# EAGLE board obc (EAGLE 9.5.0), part 1 of 2
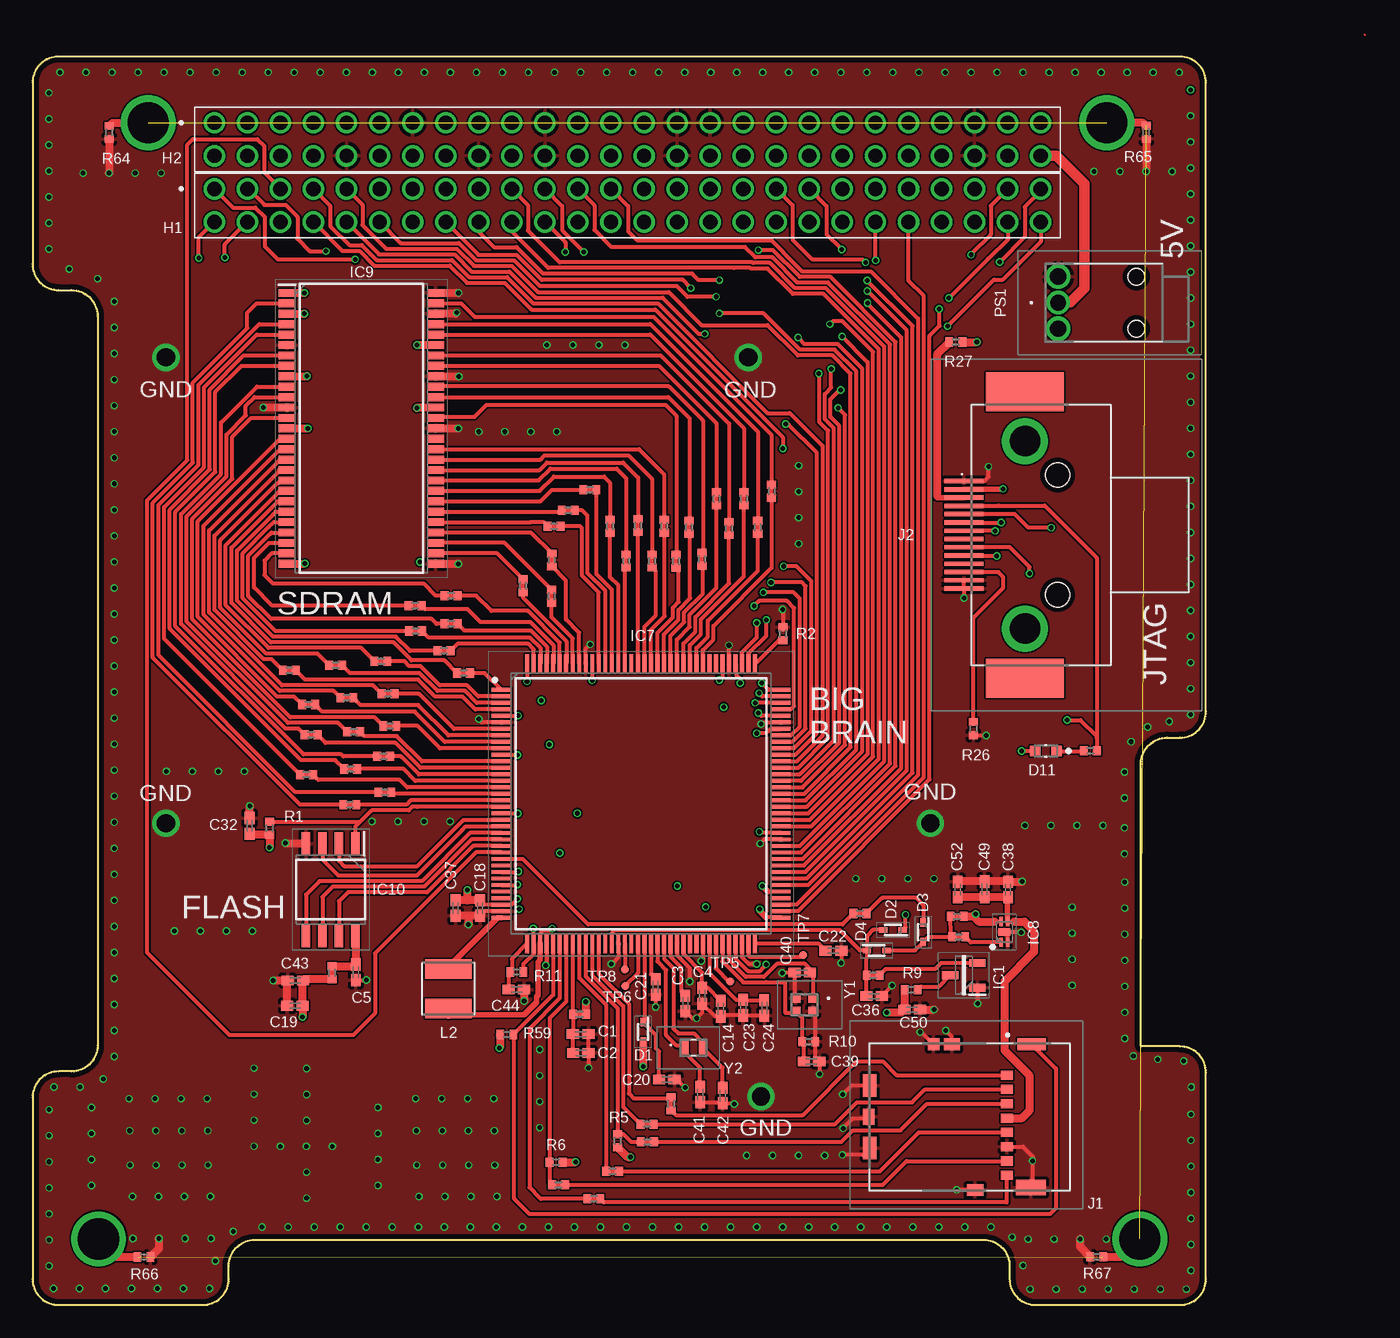
[diagram p0: board, top side]
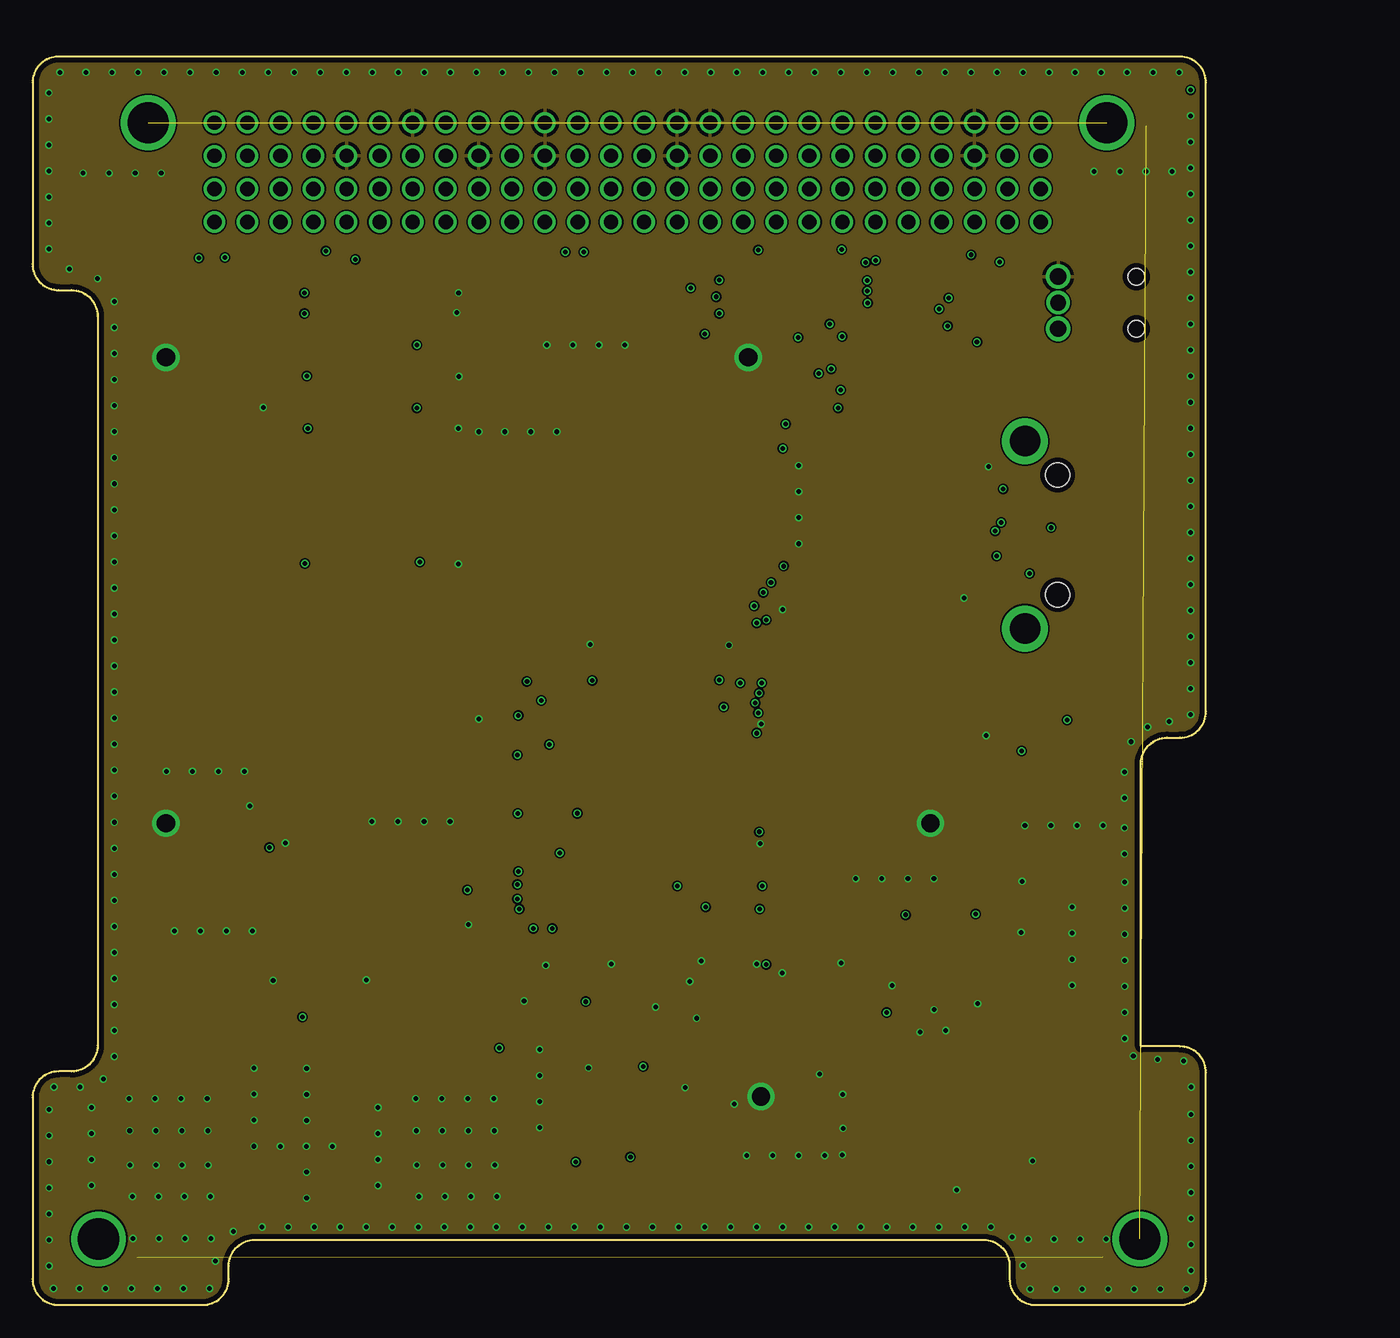
[diagram p1: board, inner layer Route2]
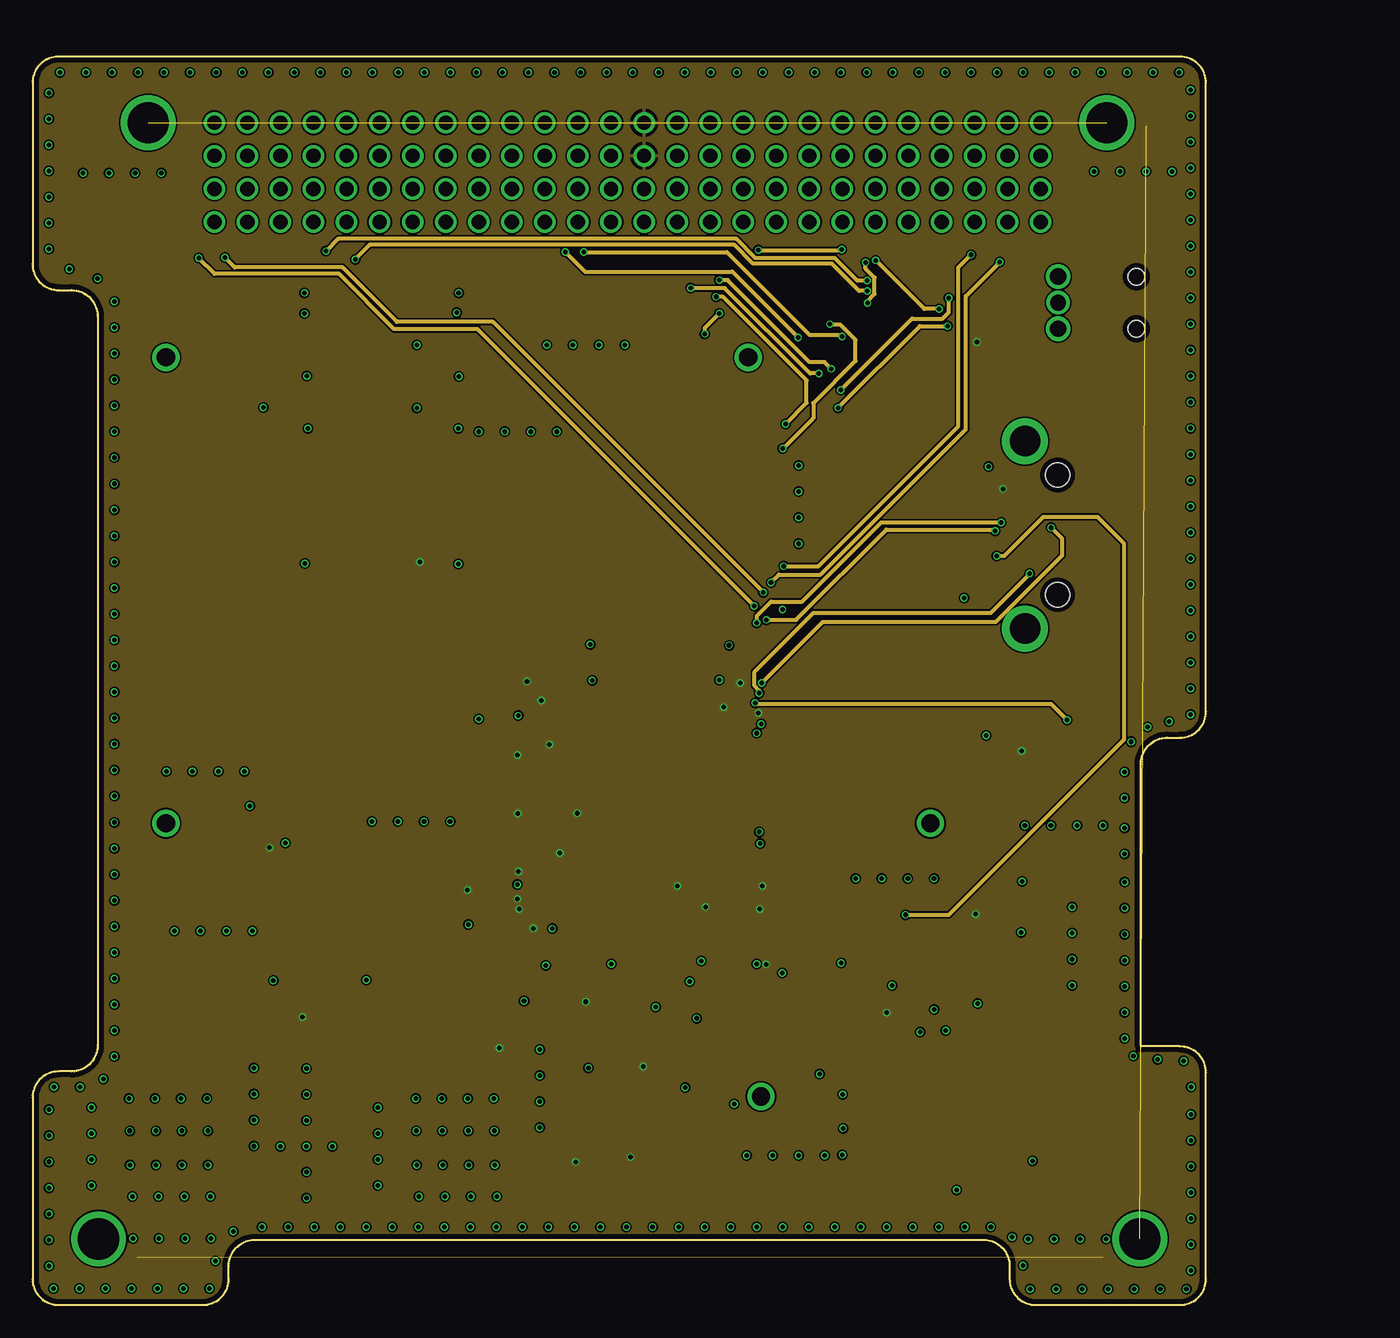
[diagram p2: board, inner layer Route15]
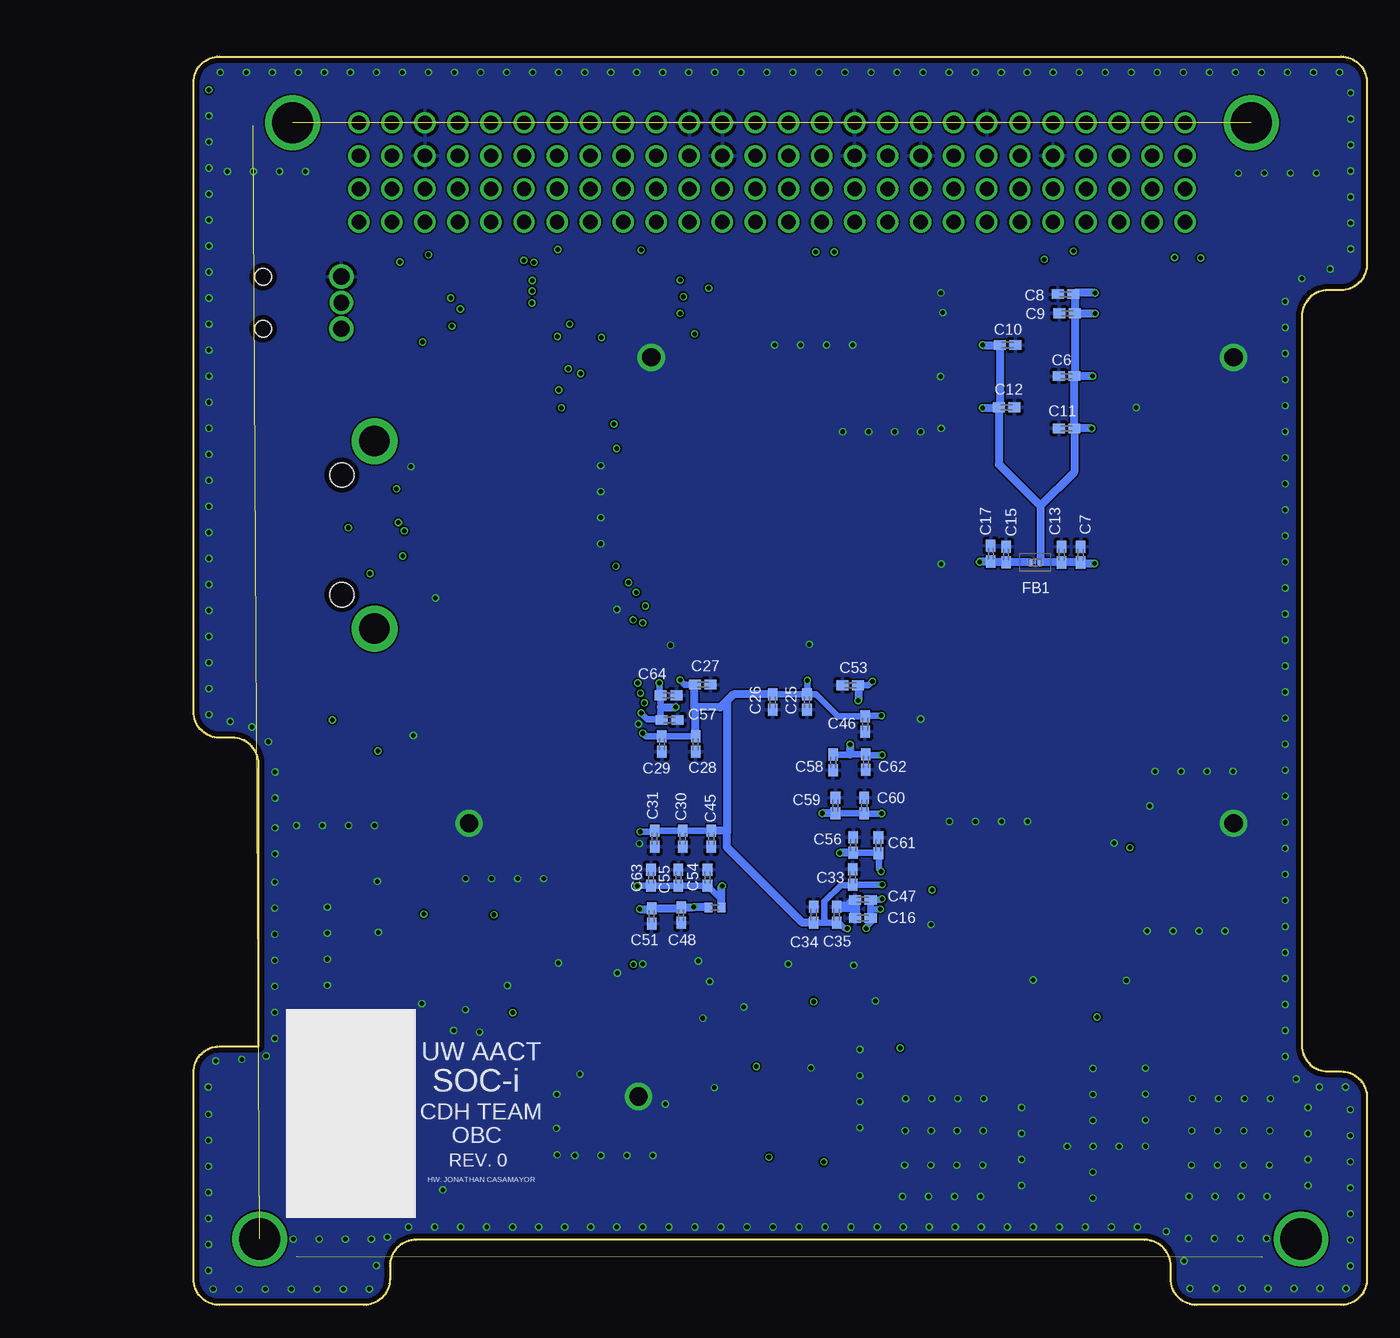
[diagram p3: board, bottom side, seen from below]

Size 90.17 x 95.89 mm. Coordinates in mm from the lower left corner, seen from the top.
Outline: 85.17,19.86 85.17,41.57 arc-90 87.17,43.57 88.17,43.57 arc90 90.17,45.57 90.17,93.89 arc90 88.17,95.89 2,95.89 arc90 0,93.89 0,79.95 arc90 2,77.95 3,77.95 arc-90 5,75.95 5,19.94 arc-90 3,17.94 2,17.94 arc90 0,15.94 0,2 arc90 2,0 13.08,0 arc90 15.08,2 15.08,3 arc-90 17.08,5 73.08,5 arc-90 75.08,3 75.08,2 arc90 77.08,0 88.17,0 arc90 90.17,2 90.17,17.86 arc90 88.17,19.86 85.17,19.86
Copper layers (1*2*15*16): Top 0.035559375mm / dielectric 0.17018125mm / Route2 0.01778125mm / dielectric 47mil / Route15 0.01778125mm / dielectric 0.17018125mm / Bottom 0.035559375mm
Design rules "oshpark-4layer *": minimum track width 5mil, minimum drill 10mil, track to track 5mil, track to pad 5mil, pad to pad 5mil, via to via 5mil, smd to smd 5mil, copper to edge 15mil, drill to drill 6mil, minimum pad ring 4mil, minimum via ring 4mil, stop-mask expansion 2.5mil, vias tented up to drill 0.36mm, thermal gap 10mil

## Footprints (pad centres in the part's own frame; a part is rotated, then mirrored left to right if it is on the bottom)
C0402K = smd 0.925 x 0.74: 1 -0.6,0; 2 0.6,0
SODFL1608X70N = smd 0.64 x 0.42: 1 -0.75,0; 2 0.75,0
KINGBRIGHT_KPT-1608SGC_0 = smd 0.8 x 0.8: 1 -0.825,0; 2 0.825,0
NFZ15SG152SN10B = smd 0.4 x 0.5: 1 -0.4,0; 2 0.4,0
SAMTEC_ESQ-126-39-G-D = drill 1.1: 1 0,0; 2 0,-2.54; 3 2.54,0; 4 2.54,-2.54; 5 5.08,0; 6 5.08,-2.54; 7 7.62,0; 8 7.62,-2.54; 9 10.16,0; 10 10.16,-2.54; 11 12.7,0; 12 12.7,-2.54; 13 15.24,0; 14 15.24,-2.54; 15 17.78,0; 16 17.78,-2.54; 17 20.32,0; 18 20.32,-2.54; 19 22.86,0; 20 22.86,-2.54; 21 25.4,0; 22 25.4,-2.54; 23 27.94,0; 24 27.94,-2.54; 25 30.48,0; 26 30.48,-2.54; 27 33.02,0; 28 33.02,-2.54; 29 35.56,0; 30 35.56,-2.54; 31 38.1,0; 32 38.1,-2.54; 33 40.64,0; 34 40.64,-2.54; 35 43.18,0; 36 43.18,-2.54; 37 45.72,0; 38 45.72,-2.54; 39 48.26,0; 40 48.26,-2.54; 41 50.8,0; 42 50.8,-2.54; 43 53.34,0; 44 53.34,-2.54; 45 55.88,0; 46 55.88,-2.54; 47 58.42,0; 48 58.42,-2.54; 49 60.96,0; 50 60.96,-2.54; 51 63.5,0; 52 63.5,-2.54
SOT95P237X112-3N = smd 1.25 x 0.6: 1 -1.05,0.95; 2 -1.05,-0.95; 3 1.05,0
QFP50P2200X2200X160-144N = smd 1.475 x 0.3: 1 -10.738,8.75; 2 -10.738,8.25; 3 -10.738,7.75; 4 -10.738,7.25; 5 -10.738,6.75; 6 -10.738,6.25; 7 -10.738,5.75; 8 -10.738,5.25; 9 -10.738,4.75; 10 -10.738,4.25; 11 -10.738,3.75; 12 -10.738,3.25; 13 -10.738,2.75; 14 -10.738,2.25; 15 -10.738,1.75; 16 -10.738,1.25; 17 -10.738,0.75; 18 -10.738,0.25; 19 -10.738,-0.25; 20 -10.738,-0.75; 21 -10.738,-1.25; 22 -10.738,-1.75; 23 -10.738,-2.25; 24 -10.738,-2.75; 25 -10.738,-3.25; 26 -10.738,-3.75; 27 -10.738,-4.25; 28 -10.738,-4.75; 29 -10.738,-5.25; 30 -10.738,-5.75; 31 -10.738,-6.25; 32 -10.738,-6.75; 33 -10.738,-7.25; 34 -10.738,-7.75; 35 -10.738,-8.25; 36 -10.738,-8.75; 73 10.738,-8.75; 74 10.738,-8.25; 75 10.738,-7.75; 76 10.738,-7.25; 77 10.738,-6.75; 78 10.738,-6.25; 79 10.738,-5.75; 80 10.738,-5.25; 81 10.738,-4.75; 82 10.738,-4.25; 83 10.738,-3.75; 84 10.738,-3.25; 85 10.738,-2.75; 86 10.738,-2.25; 87 10.738,-1.75; 88 10.738,-1.25; 89 10.738,-0.75; 90 10.738,-0.25; 91 10.738,0.25; 92 10.738,0.75; 93 10.738,1.25; 94 10.738,1.75; 95 10.738,2.25; 96 10.738,2.75; 97 10.738,3.25; 98 10.738,3.75; 99 10.738,4.25; 100 10.738,4.75; 101 10.738,5.25; 102 10.738,5.75; 103 10.738,6.25; 104 10.738,6.75; 105 10.738,7.25; 106 10.738,7.75; 107 10.738,8.25; 108 10.738,8.75 | smd 0.3 x 1.475: 37 -8.75,-10.738; 38 -8.25,-10.738; 39 -7.75,-10.738; 40 -7.25,-10.738; 41 -6.75,-10.738; 42 -6.25,-10.738; 43 -5.75,-10.738; 44 -5.25,-10.738; 45 -4.75,-10.738; 46 -4.25,-10.738; 47 -3.75,-10.738; 48 -3.25,-10.738; 49 -2.75,-10.738; 50 -2.25,-10.738; 51 -1.75,-10.738; 52 -1.25,-10.738; 53 -0.75,-10.738; 54 -0.25,-10.738; 55 0.25,-10.738; 56 0.75,-10.738; 57 1.25,-10.738; 58 1.75,-10.738; 59 2.25,-10.738; 60 2.75,-10.738; 61 3.25,-10.738; 62 3.75,-10.738; 63 4.25,-10.738; 64 4.75,-10.738; 65 5.25,-10.738; 66 5.75,-10.738; 67 6.25,-10.738; 68 6.75,-10.738; 69 7.25,-10.738; 70 7.75,-10.738; 71 8.25,-10.738; 72 8.75,-10.738; 109 8.75,10.738; 110 8.25,10.738; 111 7.75,10.738; 112 7.25,10.738; 113 6.75,10.738; 114 6.25,10.738; 115 5.75,10.738; 116 5.25,10.738; 117 4.75,10.738; 118 4.25,10.738; 119 3.75,10.738; 120 3.25,10.738; 121 2.75,10.738; 122 2.25,10.738; 123 1.75,10.738; 124 1.25,10.738; 125 0.75,10.738; 126 0.25,10.738; 127 -0.25,10.738; 128 -0.75,10.738; 129 -1.25,10.738; 130 -1.75,10.738; 131 -2.25,10.738; 132 -2.75,10.738; 133 -3.25,10.738; 134 -3.75,10.738; 135 -4.25,10.738; 136 -4.75,10.738; 137 -5.25,10.738; 138 -5.75,10.738; 139 -6.25,10.738; 140 -6.75,10.738; 141 -7.25,10.738; 142 -7.75,10.738; 143 -8.25,10.738; 144 -8.75,10.738
SON50P160X120X60-5N = smd 0.7 x 0.3: 1 -0.8,0.25; 2 -0.8,-0.25; 3 0.8,-0.25; 4 0.8,0.25 | smd 0.55 x 0.91: 5 0,0
SOP80P1176X120-54N = smd 1.27 x 0.6: 1 -5.715,10.4; 2 -5.715,9.6; 3 -5.715,8.8; 4 -5.715,8; 5 -5.715,7.2; 6 -5.715,6.4; 7 -5.715,5.6; 8 -5.715,4.8; 9 -5.715,4; 10 -5.715,3.2; 11 -5.715,2.4; 12 -5.715,1.6; 13 -5.715,0.8; 14 -5.715,0; 15 -5.715,-0.8; 16 -5.715,-1.6; 17 -5.715,-2.4; 18 -5.715,-3.2; 19 -5.715,-4; 20 -5.715,-4.8; 21 -5.715,-5.6; 22 -5.715,-6.4; 23 -5.715,-7.2; 24 -5.715,-8; 25 -5.715,-8.8; 26 -5.715,-9.6; 27 -5.715,-10.4; 28 5.715,-10.4; 29 5.715,-9.6; 30 5.715,-8.8; 31 5.715,-8; 32 5.715,-7.2; 33 5.715,-6.4; 34 5.715,-5.6; 35 5.715,-4.8; 36 5.715,-4; 37 5.715,-3.2; 38 5.715,-2.4; 39 5.715,-1.6; 40 5.715,-0.8; 41 5.715,0; 42 5.715,0.8; 43 5.715,1.6; 44 5.715,2.4; 45 5.715,3.2; 46 5.715,4; 47 5.715,4.8; 48 5.715,5.6; 49 5.715,6.4; 50 5.715,7.2; 51 5.715,8; 52 5.715,8.8; 53 5.715,9.6; 54 5.715,10.4
SOIC127P790X216-8N = smd 1.785 x 0.65: 1 -3.532,1.905; 2 -3.532,0.635; 3 -3.532,-0.635; 4 -3.532,-1.905; 5 3.532,-1.905; 6 3.532,-0.635; 7 3.532,0.635; 8 3.532,1.905
5040771891 = smd 0.7 x 0.95: 1 -2.847,2.887; 2 -1.747,2.887; 3 -0.647,2.887; 4 0.453,2.887; 5 1.553,2.887; 6 2.653,2.887; 7 3.753,2.887; 8 4.853,2.887 | smd 0.95 x 2.17: 9 -5.222,4.787 | smd 1.19 x 2.3: 10 5.798,4.722 | smd 0.88 x 1.25: 11 5.963,0.447 | smd 1.7 x 1.03: 12 2.753,-7.663; 13 -2.047,-7.663 | smd 1.2 x 0.88: 14 0.353,-7.738 | smd 0.95 x 1.2: 15 -5.222,-1.338 | smd 0.9 x 0.9: 16 -5.222,-2.748
12214825000FR = smd 0.335 x 3: 1 4.127,8.65; 2 2.857,8.65; 3 1.587,8.65; 4 0.317,8.65; 5 -0.953,8.65; 6 -2.223,8.65; 7 -3.493,8.65; 8 3.492,8.65; 9 2.223,8.65; 10 0.953,8.65; 11 -0.318,8.65; 12 -1.588,8.65; 13 -2.858,8.65; 14 -4.128,8.65 | drill 2.35 pad 3.525: MH1 -7.2,3.95; MH2 7.2,3.95 | smd 3 x 6: MP1 -11,3.95; MP2 11,3.95 | hole 1.88: -4.6,1.45; 4.6,1.45
SRN4026 = smd 1.5 x 3.6: 1 -1.525,0; 2 1.525,0
PJ040D = drill 1.209 pad 1.768: 1 6,-3 | drill 1.26 pad 1.768: 2 6,-5; 3 6,-1 | hole 1.3: 0,-5; 0,-1
R0402 = smd 0.6 x 0.7: 1 -0.5,0; 2 0.5,0
TP06R = smd 0.6 x 0.6: TP 0,0
XRCGB24M000F2P01R0 = smd 0.75 x 0.7: 1 -0.675,-0.5; 2 0.675,-0.5; 3 0.675,0.5; 4 -0.675,0.5
ECS327712TR = smd 0.6 x 1.1: 1 -0.7,0; 2 0.7,0

## Placement (x,y rotation side)
C1  0.1uF  [C0402K]  42.11,20.8 180 top
C2  4.7uF  [C0402K]  42.14,19.35 180 top
C3  1.0 uF  [C0402K]  50.16,23.16 90 top
C4  0.1uF  [C0402K]  51.46,23.75 90 top
C5  1.0uF  [C0402K]  24.84,25.55 90 top
C6  4.7uF  [C0402K]  23.09,71.35 180 bottom
C7  0.1uF  [C0402K]  22,57.63 90 bottom
C8  0.1uF  [C0402K]  23.16,77.65 180 bottom
C9  0.1uF  [C0402K]  23.04,76.17 180 bottom
C10  0.1uF  [C0402K]  27.61,73.74 0 bottom
C11  0.1uF  [C0402K]  23.09,67.34 180 bottom
C12  0.1uF  [C0402K]  27.69,68.96 0 bottom
C13  0.1uF  [C0402K]  23.47,57.63 90 bottom
C14  10 uF  [C0402K]  52.88,22.76 90 top
C15  1.0uF  [C0402K]  27.74,57.66 270 bottom
C16  0.22uF  [C0402K]  38.73,29.72 0 bottom
C17  0.1uF  [C0402K]  28.91,57.71 270 bottom
C18  4.7uF  [C0402K]  34.39,30.48 90 top
C19  0.22uF  [C0402K]  20.17,22.99 0 top
C20  0.22uF  [C0402K]  48.74,17.32 180 top
C21  0.22uF  [C0402K]  47.88,24.43 90 top
C22  0.22uF  [C0402K]  61.54,27.2 180 top
C23  0.1uF  [C0402K]  54.61,22.83 90 top
C24  4.7uF  [C0402K]  56.24,22.81 90 top
C25  0.22uF  [C0402K]  43.03,46.3 90 bottom
C26  0.22uF  [C0402K]  45.67,46.3 90 bottom
C27  0.22uF  [C0402K]  51.03,47.65 180 bottom
C28  0.22uF  [C0402K]  51.59,43.08 90 bottom
C29  0.22uF  [C0402K]  54.18,43.08 90 bottom
C30  0.22uF  [C0402K]  52.58,35.81 90 bottom
C31  0.22uF  [C0402K]  54.74,35.81 90 bottom
C32  0.1uF  [C0402K]  16.69,36.8 270 top
C33  0.22uF  [C0402K]  39.52,32.87 270 bottom
C34  0.22uF  [C0402K]  42.52,29.97 270 bottom
C35  4.7uF  [C0402K]  40.74,29.97 270 bottom
C36  0.1uF  [C0402K]  64.67,23.72 180 top
C37  0.1uF  [C0402K]  32.51,30.48 90 top
C38  0.1uF  [C0402K]  74.96,31.9 270 top
C39  4.7pF  [C0402K]  59.87,18.69 180 top
C40  4.7pF  [C0402K]  59.13,25.53 0 top
C41  10pF  [C0402K]  51.31,16.15 90 top
C42  10pF  [C0402K]  53.04,16.08 90 top
C43  0.1uF  [C0402K]  20.19,24.92 0 top
C44  0.22uF  [C0402K]  37.19,24.23 180 top
C45  0.22uF  [C0402K]  50.39,35.81 90 bottom
C46  0.22uF  [C0402K]  38.56,44.63 90 bottom
C47  0.22uF  [C0402K]  38.73,31.11 0 bottom
C48  0.22uF  [C0402K]  52.7,29.95 90 bottom
C49  4.7uF  [C0402K]  73.15,31.93 270 top
C50  1.0uF  [C0402K]  67.59,22.68 180 top
C51  4.7uF  [C0402K]  54.97,29.87 90 bottom
C52  4.7uF  [C0402K]  71.09,31.9 270 top
C53  0.1uF  [C0402K]  39.7,47.6 0 bottom
C54  0.1uF  [C0402K]  50.67,32.82 270 bottom
C55  0.1uF  [C0402K]  52.91,32.82 270 bottom
C56  0.1uF  [C0402K]  39.47,35.33 270 bottom
C57  0.1uF  [C0402K]  53.59,44.93 180 bottom
C58  0.1uF  [C0402K]  41.02,41.68 90 bottom
C59  0.1uF  [C0402K]  40.84,38.35 270 bottom
C60  4.7uF  [C0402K]  38.63,38.35 270 bottom
C61  4.7uF  [C0402K]  37.54,35.31 270 bottom
C62  4.7uF  [C0402K]  38.51,41.71 90 bottom
C63  4.7uF  [C0402K]  55.02,32.82 270 bottom
C64  4.7uF  [C0402K]  53.67,46.84 180 bottom
D1  BAT54XV2T1G  [SODFL1608X70N]  46.91,20.98 270 top
D2  BAT54XV2T1G  [SODFL1608X70N]  66.12,28.8 180 top
D3  BAT54XV2T1G  [SODFL1608X70N]  68.45,28.63 270 top
D4  BAT54XV2T1G  [SODFL1608X70N]  64.87,27.23 0 top
D11  KINGBRIGHT_KPT-1608SGCKINGBRIGHT_KPT-1608SGC_0_0  [KINGBRIGHT_KPT-1608SGC_0]  77.88,42.55 180 top
FB1  BLM15AG121SN1D  [NFZ15SG152SN10B]  25.5,57.05 0 bottom
H1  ESQ-126-39-G-D  [SAMTEC_ESQ-126-39-G-D]  13.97,85.73 0 top
H2  ESQ-126-39-G-D  [SAMTEC_ESQ-126-39-G-D]  13.97,90.81 0 top
IC1  TPS3839L30DBZR  [SOT95P237X112-3N]  71.55,25.32 180 top
IC7  MIMXRT1021DAG5A  [QFP50P2200X2200X160-144N]  46.76,38.51 0 top
IC8  MIC94305YMT-TR  [SON50P160X120X60-5N]  74.68,28.65 90 top
IC9  IS42S16160J-6TL  [SOP80P1176X120-54N]  25.27,67.34 0 top
IC10  IS25LP064A-JBLE  [SOIC127P790X216-8N]  22.91,31.9 270 top
J1  504077-1891  [5040771891]  71.98,14.81 270 top
J2  12214-8250-00FR  [12214825000FR]  80.21,59.16 90 top
L2  SRN4026-4R7M  [SRN4026]  31.95,24.28 90 top
PS1  PJ-040D  [PJ040D]  84.81,73.99 180 top
R1  10k Ohm  [R0402]  18.21,36.63 90 top
R2  10k Ohm  [R0402]  57.66,51.56 270 top
R3  0 Ohm  [R0402]  42.04,22.33 180 top
R4  0 Ohm  [R0402]  23.01,25.53 90 top
R5  10k Ohm  [R0402]  44.96,12.62 90 top
R6  10k Ohm  [R0402]  40.23,10.97 180 top
R7  0 Ohm  [R0402]  63.58,30.07 0 top
R8  0 Ohm  [R0402]  64.59,25.32 180 top
R9  1k Ohm  [R0402]  67.51,24.21 0 top
R10  2.2M Ohm  [R0402]  59.64,20.22 0 top
R11  30k Ohm  [R0402]  37.21,25.58 0 top
R12  0 Ohm  [R0402]  56.79,62.51 90 top
R13  0 Ohm  [R0402]  55.73,59.74 90 top
R14  0 Ohm  [R0402]  54.66,61.93 90 top
R15  0 Ohm  [R0402]  53.52,59.64 90 top
R16  0 Ohm  [R0402]  52.55,61.93 90 top
R17  0 Ohm  [R0402]  51.44,57.28 90 top
R18  0 Ohm  [R0402]  50.44,59.74 90 top
R19  0 Ohm  [R0402]  49.45,57.12 90 top
R20  0 Ohm  [R0402]  48.54,59.82 90 top
R21  0 Ohm  [R0402]  47.6,57.15 90 top
R22  0 Ohm  [R0402]  46.53,59.87 90 top
R23  0 Ohm  [R0402]  45.62,57.15 90 top
R24  0 Ohm  [R0402]  44.37,59.82 90 top
R25  0 Ohm  [R0402]  42.82,62.61 180 top
R26  100 Ohm  [R0402]  72.29,44.27 270 top
R27  100 Ohm  [R0402]  70.94,73.96 0 top
R28  0 Ohm  [R0402]  41.17,61.04 180 top
R29  0 Ohm  [R0402]  40.08,59.82 180 top
R30  0 Ohm  [R0402]  39.9,57.23 90 top
R31  0 Ohm  [R0402]  39.88,54.43 90 top
R32  0 Ohm  [R0402]  37.69,55.24 90 top
R33  0 Ohm  [R0402]  24.38,38.43 0 top
R34  0 Ohm  [R0402]  27.08,39.4 0 top
R35  0 Ohm  [R0402]  21.06,40.74 0 top
R36  0 Ohm  [R0402]  24.43,41.17 0 top
R37  0 Ohm  [R0402]  26.97,42.14 0 top
R38  0 Ohm  [R0402]  21.41,43.79 0 top
R39  0 Ohm  [R0402]  24.66,44.02 0 top
R40  0 Ohm  [R0402]  27.46,44.48 0 top
R41  0 Ohm  [R0402]  21.21,46.13 0 top
R42  0 Ohm  [R0402]  24.16,46.63 0 top
R43  0 Ohm  [R0402]  27.33,46.94 0 top
R44  0 Ohm  [R0402]  19.74,48.74 0 top
R45  0 Ohm  [R0402]  23.29,49.15 0 top
R46  0 Ohm  [R0402]  26.77,49.45 0 top
R47  0 Ohm  [R0402]  33.12,48.54 0 top
R48  0 Ohm  [R0402]  31.62,50.24 0 top
R49  0 Ohm  [R0402]  29.44,51.77 0 top
R50  0 Ohm  [R0402]  32.16,52.32 0 top
R51  0 Ohm  [R0402]  29.39,53.72 0 top
R52  0 Ohm  [R0402]  32.16,54.48 0 top
R53  0 Ohm  [R0402]  49.07,15.44 270 top
R54  0 Ohm  [R0402]  47.22,13.89 0 top
R55  0 Ohm  [R0402]  47.24,12.52 0 top
R56  0 Ohm  [R0402]  44.58,10.26 0 top
R57  0 Ohm  [R0402]  40.41,9.22 0 top
R58  0 Ohm  [R0402]  43.13,8.15 0 top
R59  10k Ohm  [R0402]  36.45,20.78 180 top
R60  0 Ohm  [R0402]  71.17,28.27 0 top
R61  0 Ohm  [R0402]  71.04,29.84 0 top
R62  0 Ohm  [R0402]  50.09,30.53 180 bottom
R63  0 Ohm  [R0402]  81.28,42.57 0 top
R64  0 Ohm  [R0402]  5.89,90.06 90 top
R65  0 Ohm  [R0402]  85.57,90.07 90 top
R66  0 Ohm  [R0402]  8.56,3.68 180 top
R67  0 Ohm  [R0402]  81.76,3.71 0 top
TP5  TPTP06R  [TP06R]  53.59,24.84 90 top
TP6  TPTP06R  [TP06R]  45.54,24.51 0 top
TP7  TPTP06R  [TP06R]  59.21,26.9 0 top
TP8  TPTP06R  [TP06R]  45.52,25.78 0 top
Y1  XRCGB24M000F2P01R0  [XRCGB24M000F2P01R0]  59.31,23.06 180 top
Y2  ECS-.327-7-12-TR  [ECS327712TR]  50.8,19.76 0 top

## Library data of the parts
C1-C64 = rcl; SPICEPREFIX: C
D1-D4 = BAT54XV2T1G; DESCRIPTION: Diode Schottky 30V 0.2A 5ns SOD-523 ON Semiconductor BAT54XV2T1G Schottky Diode, 0.2A, 30V, 5ns, 2-Pin SOD-523; HEIGHT: 0.7mm; MANUFACTURER_NAME: ON Semiconductor; MANUFACTURER_PART_NUMBER: BAT54XV2T1G; MOUSER_PART_NUMBER: 863-BAT54XV2T1G; MOUSER_PRICE-STOCK: https://www.mouser.co.uk/ProductDetail/ON-Semiconductor/BAT54XV2T1G?qs=vLkC5FC1VN8vpceP7xcdrw%3D%3D
D11 = Kingbright - KPT-1608SGC; CENTROID_NOT_SPECIFIED: No; COLOUR: Green; DATASHEET: http://www.kingbright.com/attachments/file/psearch/000/00/00/KPT-1608SGC(Ver.29B).pdf; DEVICE_CLASS_L1: Optoelectronics; DEVICE_CLASS_L2: LEDs; DEVICE_CLASS_L3: unset; FORWARD_CURRENT: 25mA; FORWARD_VOLTAGE: 2.2V; HEIGHT: 0.85mm; LEAD_FREE: yes; LED_ORIENTATION: Top View; LUMINOUS_INTENSITY: 12mcd; MAX_JUNCTION_TEMP: +110°C; MF: Kingbright; MFG_PACKAGE_IDENT: KPT-1608SGC; MFG_PACKAGE_IDENT_DATE: 0; MFG_PACKAGE_IDENT_REV: 0; MPN: KPT-1608SGC; PACKAGE: 0603; POWER_DISSIPATION: 62.5mW; PREFIX: D; REVERSE_VOLTAGE: 5V; ROHS: yes; TEMPERATURE_RANGE_HIGH: +85°C; TEMPERATURE_RANGE_LOW: -40°C; VERIFICATION_VERSION: 0.0.0.1; VIEWING_ANGLE: 150°; WAVELENGTH: 568nm
FB1 = BLM15AG121SN1D; DESCRIPTION: Ferrite bead SMD 0402 120R 500mA Murata Ferrite Bead (Chip Ferrite Bead), 1 x 0.5 x 0.5mm (0402), 120 impedance at 100 MHz; HEIGHT: 0.55mm; MANUFACTURER_NAME: Murata Electronics; MANUFACTURER_PART_NUMBER: BLM15AG121SN1D; MOUSER_PART_NUMBER: 81-BLM15AG121SN1D; MOUSER_PRICE-STOCK: https://www.mouser.co.uk/ProductDetail/Murata-Electronics/BLM15AG121SN1D?qs=0mZ9c%252Bni6FbHnpaodfEgFg%3D%3D
H1 H2 = ESQ-126-39-G-D; DESCRIPTION: 52 Position Elevated Socket Connector Through Hole; DIGI-KEY_PART_NUMBER: SAM10462-ND; DIGI-KEY_PURCHASE_URL: https://www.digikey.com/product-detail/en/samtec-inc/ESQ-126-39-G-D/SAM10462-ND/3601055?utm_source=snapeda&utm_medium=aggregator&utm_campaign=symbol; MF: Samtec; MP: ESQ-126-39-G-D; PACKAGE: None
IC1 = TPS3839L30DBZR; DESCRIPTION: Ultra-Low Power, Supply Voltage Supervisor; HEIGHT: 1.12mm; MANUFACTURER_NAME: Texas Instruments; MANUFACTURER_PART_NUMBER: TPS3839L30DBZR; MOUSER_PART_NUMBER: 595-TPS3839L30DBZR; MOUSER_PRICE-STOCK: https://www.mouser.co.uk/ProductDetail/Texas-Instruments/TPS3839L30DBZR?qs=4whTb%2F0XQMhk4SkTOVaKEw%3D%3D
IC7 = MIMXRT1021DAG5A; DESCRIPTION: Processors - Application Specialized i.MXRT1020 144LQFP; HEIGHT: 1.6mm; MANUFACTURER_NAME: NXP; MANUFACTURER_PART_NUMBER: MIMXRT1021DAG5A; MOUSER_PART_NUMBER: 771-MIMXRT1021DAG5A; MOUSER_PRICE-STOCK: https://www.mouser.co.uk/ProductDetail/NXP-Semiconductors/MIMXRT1021DAG5A?qs=r5DSvlrkXmJQSAxQ927JGQ%3D%3D
IC8 = MIC94305YMT-TR; DESCRIPTION: Power Switch ICs - Power Distribution 500mA Switch with Ripple Blocker Technology; HEIGHT: 0.6mm; MANUFACTURER_NAME: Microchip; MANUFACTURER_PART_NUMBER: MIC94305YMT-TR; MOUSER_PART_NUMBER: 998-MIC94305YMTTR; MOUSER_PRICE-STOCK: https://www.mouser.com/Search/Refine.aspx?Keyword=998-MIC94305YMTTR
IC9 = IS42S16160J-6TL; DESCRIPTION: DRAM 256M, 3.3V, SDRAM 16Mx16, 166MHz; HEIGHT: 1.2mm; MANUFACTURER_NAME: Integrated Silicon Solution Inc.; MANUFACTURER_PART_NUMBER: IS42S16160J-6TL; MOUSER_PART_NUMBER: 870-IS42S16160J-6TL; MOUSER_PRICE-STOCK: https://www.mouser.co.uk/ProductDetail/ISSI/IS42S16160J-6TL?qs=uCnMRCNammn45QFjEGyZuQ%3D%3D
IC10 = IS25LP064A-JBLE; DESCRIPTION: INTEGRATED SILICON SOLUTION (ISSI) - IS25LP064A-JBLE - NOR FLASH MEMORY 64MBIT, 133MHZ, SOIC-8; HEIGHT: 2.16mm; MANUFACTURER_NAME: Integrated Silicon Solution Inc.; MANUFACTURER_PART_NUMBER: IS25LP064A-JBLE; MOUSER_PART_NUMBER: N/A; MOUSER_PRICE-STOCK: https://www.mouser.com/Search/Refine.aspx?Keyword=N%2FA
J1 = 504077-1891; DESCRIPTION: Micro SD card Connector + detect switch Micro SD card Connector + detect switch; HEIGHT: 1mm; MANUFACTURER_NAME: Molex; MANUFACTURER_PART_NUMBER: 504077-1891; MOUSER_PART_NUMBER: 538-504077-1891; MOUSER_PRICE-STOCK: https://www.mouser.co.uk/ProductDetail/Molex/504077-1891?qs=H5WSs0j7A8cqevxUlTiYxw%3D%3D
J2 = 12214-8250-00FR; DESCRIPTION: D-Sub Micro-D Connectors 0.8mm 14P R/A RECEPT SMT 30u GOLD; HEIGHT: 5.3mm; MANUFACTURER_NAME: 3M; MANUFACTURER_PART_NUMBER: 12214-8250-00FR; MOUSER_PART_NUMBER: 517-12214-825000FR; MOUSER_PRICE-STOCK: https://www.mouser.co.uk/ProductDetail/3M-Electronic-Solutions-Division/12214-8250-00FR?qs=9ksnFUyBSYytHybLYSpAmg%3D%3D
L2 = SRN4026-4R7M; DESCRIPTION: Bourns SRN4026 Series Shielded Wire-wound SMD Inductor with a Ferrite Core, 4.7 uH +/-20% 1.4A Idc; HEIGHT: mm; MANUFACTURER_NAME: Bourns; MANUFACTURER_PART_NUMBER: SRN4026-4R7M; MOUSER_PART_NUMBER: 652-SRN4026-4R7M; MOUSER_PRICE-STOCK: https://www.mouser.co.uk/ProductDetail/Bourns/SRN4026-4R7M?qs=U0ECReq1GB%2FUCz6YoTEwsQ%3D%3D
PS1 = PJ-040D; DESCRIPTION: DC Power Connectors; HEIGHT: 5mm; MANUFACTURER_NAME: CUI Devices; MANUFACTURER_PART_NUMBER: PJ-040D; MOUSER_PART_NUMBER: 490-PJ-040D; MOUSER_PRICE-STOCK: https://www.mouser.com/Search/Refine.aspx?Keyword=490-PJ-040D
R1-R67 = rcl; SPICEPREFIX: R
TP5-TP8 = testpad
Y1 = XRCGB24M000F2P01R0; DESCRIPTION: 2.0x1.6x0.65mm 24MHz Crystal +/-20ppm Initial tolerance; HEIGHT: 0.7mm; MANUFACTURER_NAME: Murata Electronics; MANUFACTURER_PART_NUMBER: XRCGB24M000F2P01R0; MOUSER_PART_NUMBER: 81-XRCGB24M000F2P01R; MOUSER_PRICE-STOCK: https://www.mouser.com/Search/Refine.aspx?Keyword=81-XRCGB24M000F2P01R
Y2 = ECS-.327-7-12-TR; DESCRIPTION: Crystals 32.768KHz 7pF; HEIGHT: 0.6mm; MANUFACTURER_NAME: ECS; MANUFACTURER_PART_NUMBER: ECS-.327-7-12-TR; MOUSER_PART_NUMBER: 520-ECS-.327-7-12-TR; MOUSER_PRICE-STOCK: https://www.mouser.co.uk/ProductDetail/ECS/ECS-327-7-12-TR?qs=wo4x%252BUeoG8UnhrSkJ%252BdUcw%3D%3D

## Nets
3V3_BUS: C1.2 C2.2 C5.2 C15.2 C16.2 C17.2 C18.2 C19.2 C32.2 C37.2 C43.2 C47.2 C48.2 C50.2 C51.2 C53.2 C54.2 C55.2 C56.2 C57.2 C58.2 C59.2 C60.2 C61.2 C62.2 C63.2 C64.2 D1.2 D3.2 D4.2 D11.2 FB1.1 H2.27 H2.28 IC7.11 IC7.20 IC7.29 IC7.34 IC7.38 IC7.44 IC7.69 IC7.73 IC7.77 IC7.104 IC7.112 IC7.144 IC8.1 IC8.4 IC10.8 J2.8 R1.1 R3.1 R3.2 R4.1 R4.2 R5.1 R6.1 R9.1 R11.2 R27.2 R59.2 R60.1 R60.2 R61.1 R61.2 R62.1 R62.2
5V_USB: H2.52 PS1.1
5V_USB_OTG: C3.2 IC7.59
ANT_BURN_WIRE1: H1.23 IC7.83
ANT_BURN_WIRE2: H1.25 IC7.78
CHASSIS: R64.2 R65.2 R66.2 R67.2
DCDC_OUT: C25.2 C26.2 C27.2 C28.2 C29.2 C30.2 C31.2 C33.2 C34.2 C35.2 C45.2 C46.2 IC7.5 IC7.31 IC7.39 IC7.86 IC7.102 IC7.114 IC7.134 L2.1
DTR: H1.5 IC7.26
FLEXSPI_CLK: IC7.24 IC10.6
FLEXSPI_D0_A: IC7.23 IC10.5
FLEXSPI_D1_A: IC7.21 IC10.2
FLEXSPI_D2_A: IC7.22 IC10.3
FLEXSPI_D3_A: IC7.25 IC10.7
FLEXSPI_SS0: IC7.19 IC10.1 R1.2
GND: C1.1 C2.1 C3.1 C4.1 C5.1 C6.2 C7.2 C8.2 C9.2 C10.2 C11.2 C12.2 C13.2 C14.1 C15.1 C16.1 C17.1 C18.1 C19.1 C20.1 C21.1 C22.1 C23.1 C24.1 C25.1 C26.1 C27.1 C28.1 C29.1 C30.1 C31.1 C32.1 C33.1 C34.1 C35.1 C36.1 C37.1 C38.1 C39.1 C40.1 C41.1 C42.1 C43.1 C44.1 C45.1 C46.1 C47.1 C48.1 C49.1 C50.1 C51.1 C52.1 C53.1 C54.1 C55.1 C56.1 C57.1 C58.1 C59.1 C60.1 C61.1 C62.1 C63.1 C64.1 H2.10 H2.13 H2.18 H2.21 H2.22 H2.29 H2.30 H2.31 H2.47 H2.48 IC1.1 IC7.6 IC7.35 IC7.40 IC7.51 IC7.60 IC7.64 IC7.70 IC7.85 IC7.103 IC7.113 IC7.135 IC8.2 IC8.5 IC9.6 IC9.12 IC9.28 IC9.41 IC9.46 IC9.52 IC9.54 IC10.4 J1.6 J1.10 J1.11 J1.12 J1.13 J1.14 J1.15 J1.16 J2.1 J2.7 J2.14 PS1.2 R2.1 R10.2 R26.2 R64.1 R65.1 R66.1 R67.1 Y1.2 Y1.4
GPANAIO: IC7.71 TP7.TP
I2C1_SCL: H1.44 IC7.75
I2C1_SDA: H1.42 IC7.74
I2C2_SCL: H1.37 IC7.82
I2C2_SDA: H1.35 IC7.81
I2C3_SCL: H1.51 IC7.100
I2C3_SDA: H1.49 IC7.99
JTAG_DACK: J2.13 R26.1
JTAG_DE: J2.6
JTAG_MOD: IC7.109 R2.2
JTAG_NSRST: D2.1 J2.12
JTAG_NTRST: IC7.106 J2.9 R63.2
JTAG_RTCK: J2.11
JTAG_TCK: IC7.110 J2.4
JTAG_TDI: IC7.108 J2.3
JTAG_TDO: IC7.107 J2.5
JTAG_TMS: IC7.111 J2.10
N$3: IC1.3 R9.2
N$36: IC7.36 L2.2
N$38: J2.2 R27.1
N$41: C44.2 IC7.37 R11.1
N$59: C20.2 D1.1 IC7.55
NVCC_PLL: C22.2 IC7.72
PMIC_STBY_REQ: IC7.54 TP6.TP
POR_B: C36.2 D2.2 D4.1 IC1.2 IC7.50 R8.1 R8.2
RTC_XTALI: C41.2 IC7.57 Y2.1
RTC_XTALO: C42.2 IC7.58 Y2.2
SD1_CLK: IC7.45 J1.5 R56.1 R56.2
SD1_CMD: IC7.46 J1.3 R5.2 R55.1 R55.2
SD1_D0: IC7.43 J1.7 R6.2 R57.1 R57.2
SD1_D1: IC7.42 J1.8 R58.1 R58.2
SD1_D2: IC7.48 J1.1 R53.1 R53.2
SD1_D3: IC7.47 J1.2 R54.1 R54.2
SD_CD_SW: IC7.41 J1.9 R59.1
SD_PWREN: D3.1 IC7.27 R7.1 R7.2
SDRAM_3V3: C6.1 C7.1 C8.1 C9.1 C10.1 C11.1 C12.1 C13.1 FB1.2 IC9.1 IC9.3 IC9.9 IC9.14 IC9.27 IC9.43 IC9.49
SEMC_A0: IC7.142 IC9.23 R49.1 R49.2
SEMC_A1: IC7.141 IC9.24 R50.1 R50.2
SEMC_A2: IC7.140 IC9.25 R51.1 R51.2
SEMC_A3: IC7.139 IC9.26 R52.1 R52.2
SEMC_A4: IC7.138 IC9.29 R32.1 R32.2
SEMC_A5: IC7.137 IC9.30 R31.1 R31.2
SEMC_A6: IC7.136 IC9.31 R30.1 R30.2
SEMC_A7: IC7.133 IC9.32 R29.1 R29.2
SEMC_A8: IC7.132 IC9.33 R28.1 R28.2
SEMC_A9: IC7.131 IC9.34 R25.1 R25.2
SEMC_A10: IC7.143 IC9.22 R48.1 R48.2
SEMC_A11: IC7.130 IC9.35 R24.1 R24.2
SEMC_A12: IC7.129 IC9.36 R23.1 R23.2
SEMC_BA0: IC7.2 IC9.20 R46.1 R46.2
SEMC_BA1: IC7.1 IC9.21 R47.1 R47.2
SEMC_CAS: IC7.7 IC9.17 R43.1 R43.2
SEMC_CKE: IC7.127 IC9.37 R22.1 R22.2
SEMC_CLK: IC7.126 IC9.38 R21.1 R21.2
SEMC_CS0: IC7.3 IC9.19 R45.1 R45.2
SEMC_D0: IC7.18 IC9.2 R33.1 R33.2
SEMC_D1: IC7.17 IC9.4 R34.1 R34.2
SEMC_D2: IC7.16 IC9.5 R35.1 R35.2
SEMC_D3: IC7.15 IC9.7 R36.1 R36.2
SEMC_D4: IC7.14 IC9.8 R37.1 R37.2
SEMC_D5: IC7.13 IC9.10 R38.1 R38.2
SEMC_D6: IC7.12 IC9.11 R39.1 R39.2
SEMC_D7: IC7.10 IC9.13 R40.1 R40.2
SEMC_D8: IC7.124 IC9.42 R19.1 R19.2
SEMC_D9: IC7.123 IC9.44 R18.1 R18.2
SEMC_D10: IC7.122 IC9.45 R17.1 R17.2
SEMC_D11: IC7.121 IC9.47 R16.1 R16.2
SEMC_D12: IC7.120 IC9.48 R15.1 R15.2
SEMC_D13: IC7.119 IC9.50 R14.1 R14.2
SEMC_D14: IC7.118 IC9.51 R13.1 R13.2
SEMC_D15: IC7.117 IC9.53 R12.1 R12.2
SEMC_DM0: IC7.9 IC9.15 R41.1 R41.2
SEMC_DM1: IC7.125 IC9.39 R20.1 R20.2
SEMC_RAS: IC7.4 IC9.18 R44.1 R44.2
SEMC_WE: IC7.8 IC9.16 R42.1 R42.2
SPI1_EN0: H1.9 IC7.92
SPI1_EN1: H1.10 IC7.91
SPI1_EN2: H1.22 IC7.90
SPI1_EN3: H1.21 IC7.89
SPI1_MISO: H1.18 IC7.95
SPI1_MOSI: H1.16 IC7.96
SPI1_PCS0: H1.7 IC7.97
SPI1_PCS1: H1.8 IC7.88
SPI1_PCS2: H1.20 IC7.87
SPI1_PCS3: H1.19 IC7.84
SPI1_SCK: H1.12 IC7.98
UART1_RX: H1.4 IC7.101
UART1_TX: H1.2 IC7.105
UART3_RX: H1.52 IC7.93
UART3_TX: H1.50 IC7.94
UART4_RX: H1.3 IC7.79
UART4_TX: H1.1 IC7.80
USB_OTG1_CHD: IC7.66 TP5.TP
USER_LED: D11.1 R63.1
VDD_HIGH_CAP: C23.2 C24.2 IC7.65
VDD_SNVS_CAP: C21.2 IC7.56
VDD_USB_3V: C4.2 C14.2 IC7.61
VSD_3V3: C38.2 C49.2 C52.2 IC8.3 J1.4
WAKEUP: IC7.52 TP8.TP
XTALI: C39.2 IC7.67 R10.1 Y1.3
XTALO: C40.2 IC7.68 Y1.1